# Altium PCB Digital_voltmeter.PcbDoc
Units mm, origin at the board's own origin, x right, y up, seen from the top; angles counter-clockwise.
Board outline 77.6 x 47.12 mm, 2 copper layers (Top Layer, Bottom Layer); 35 components, 51 nets, 141 pads, 8 vias.
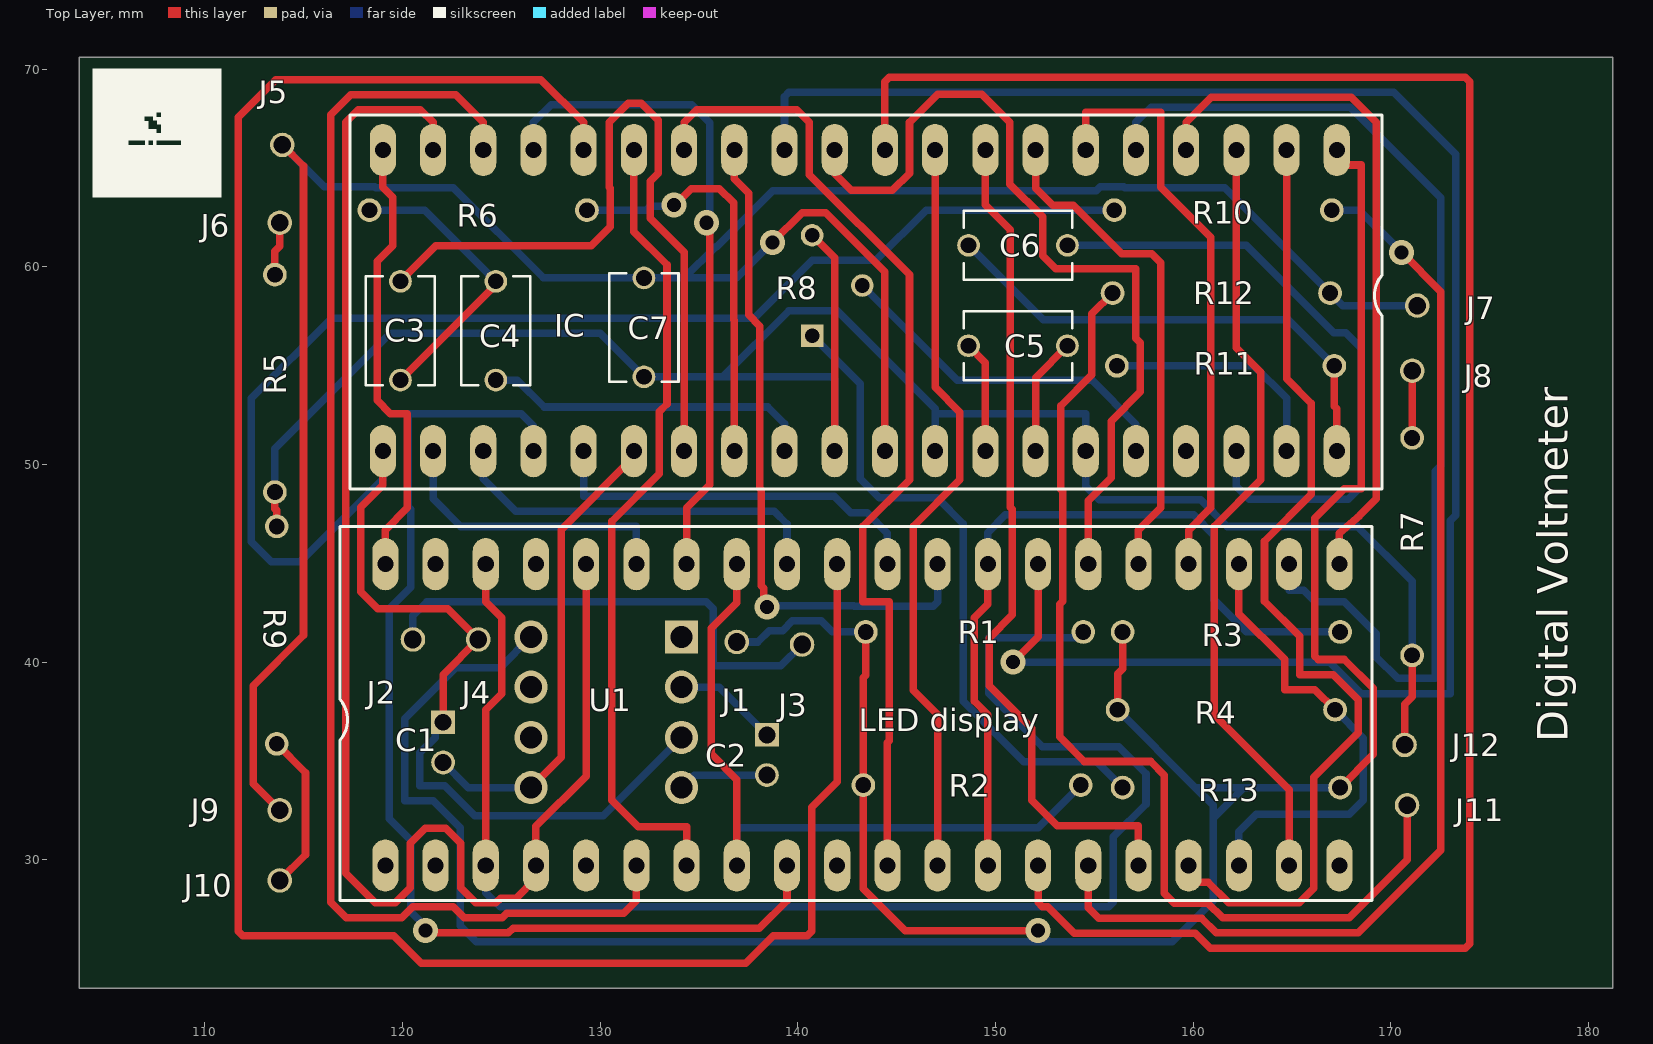
[diagram p0: Top Layer view]
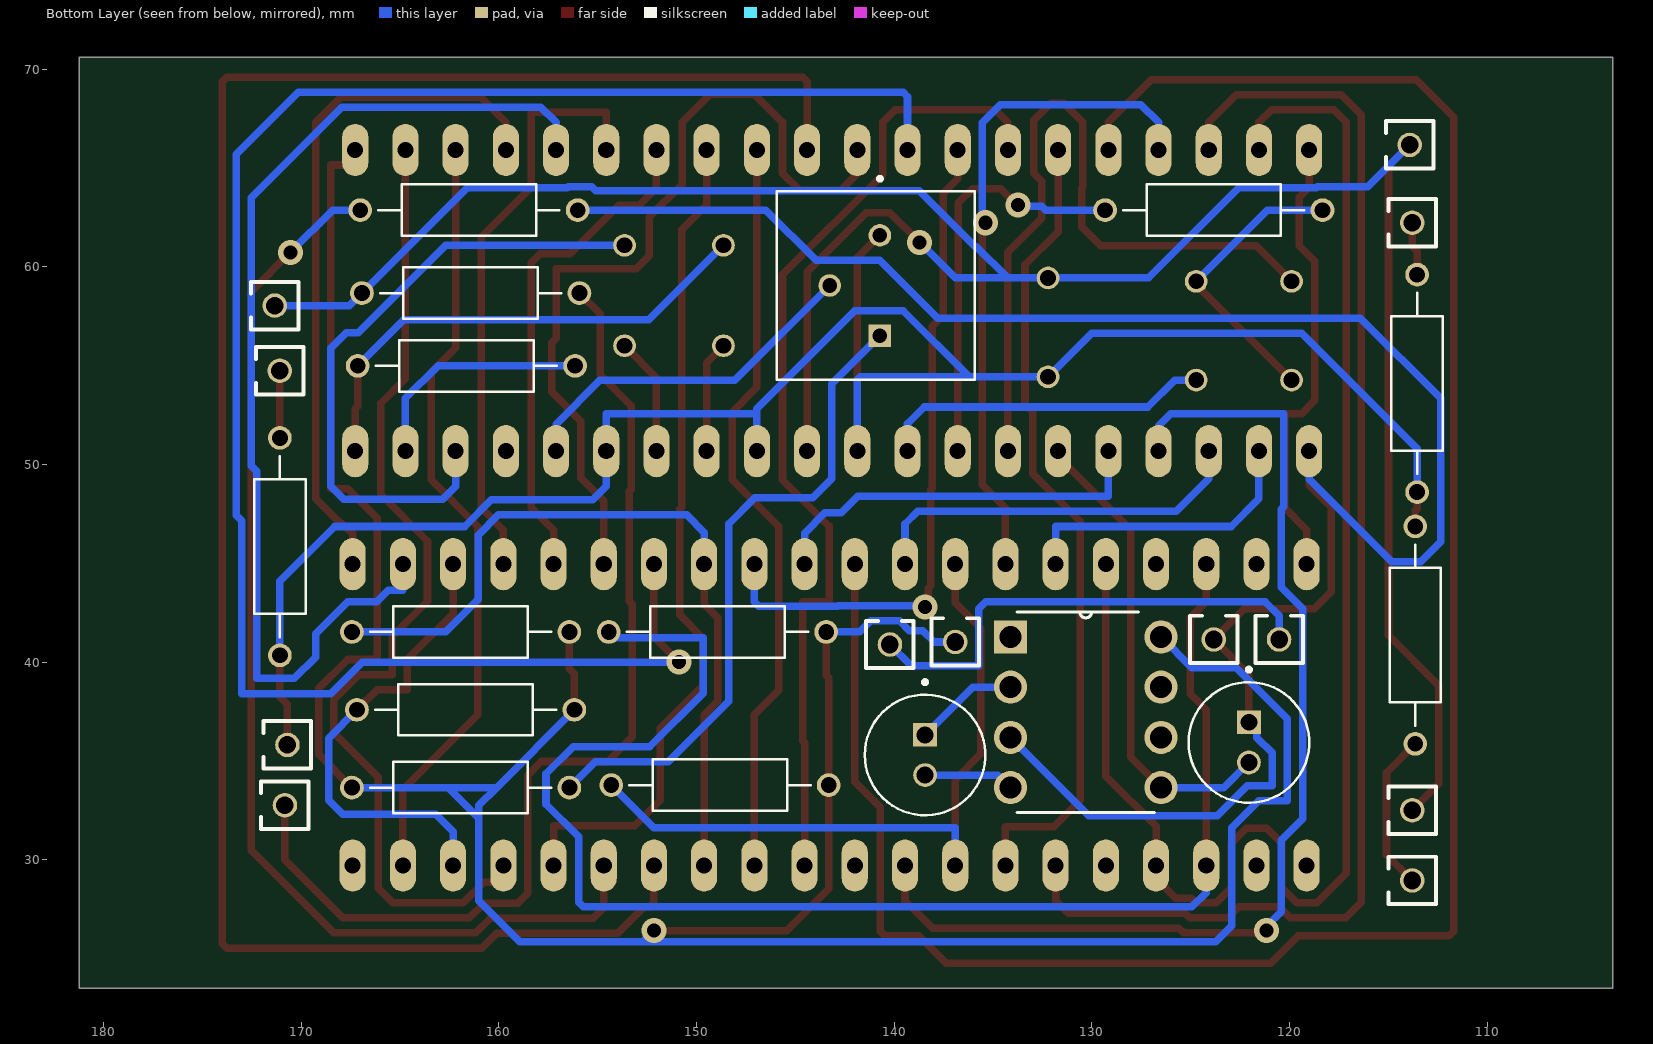
[diagram p1: Bottom Layer view, seen from below]
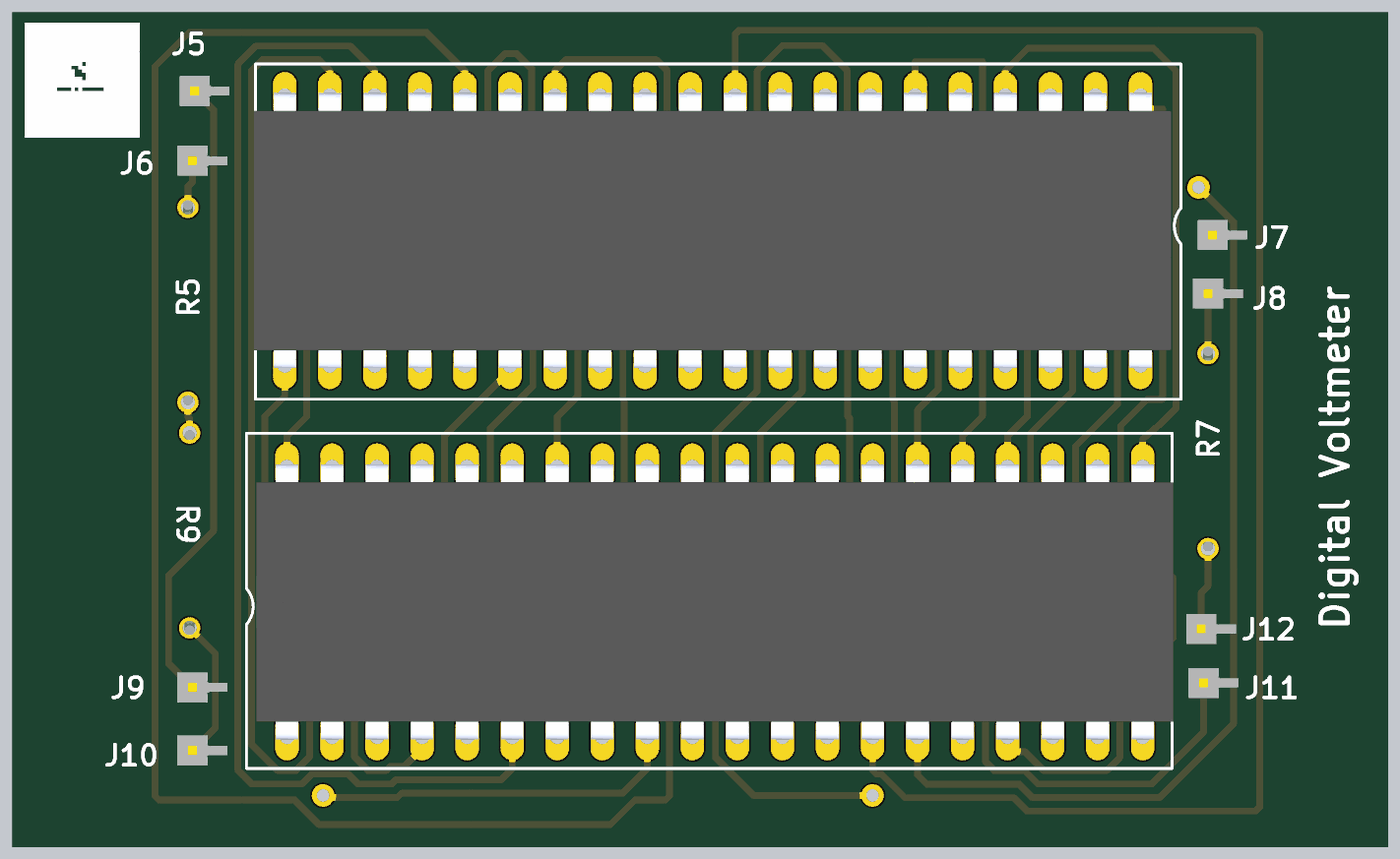
[diagram p2: 3D render of the assembled board from above, using the file's embedded part models]

## Layer stack, top to bottom
Top Solder: solder mask 0.0102, Solder Resist, Dk 3.5
Top Layer: signal copper 0.0356
Dielectric 1: dielectric 0.32, FR-4, Dk 4.8
Bottom Layer: signal copper 0.0356
Bottom Solder: solder mask 0.0102, Solder Resist, Dk 3.5

## Board outline
103.632,23.495 181.229,23.495 181.229,70.612 103.632,70.612

## Design rules (kind name [scope] priority, off if disabled: settings)
Clearance [All] p1: gap=0.5 ignorepadtopadclearanceinfootprint=TRUE except(0.381: Arc-Arc Arc-Track Arc-SMDPad Arc-THPad Arc-Via Arc-Fill Arc-Poly Arc-Region Arc-Text Track-Track Track-SMDPad Track-THPad Track-Via Track-Fill Track-Poly Track-Region Track-Text; 0.508: Arc-Hole Track-Hole SMDPad-Hole THPad-Hole Via-Hole Fill-Hole Poly-Hole Region-Hole Text-Hole)
HoleToHoleClearance [All] p1: gap=0.5 allowstackedmicrovias=TRUE
PolygonConnect [All] p1: connectstyle=Relief reliefconductorwidth=0.254 reliefentries=4 polygonreliefangle="90 Angle" airgapwidth=0.254
RoutingVias [All] p1: holewidth=0.711 width=1.27 viastyle="Through Hole" minholewidth=0.711 minwidth=1.27 maxholewidth=0.711 maxwidth=1.27
SolderMaskExpansion [All] p1: expansion=0.102 istentingtop=FALSE
Width [All] p1: maxlimit=0.508 minlimit=0.254 preferedwidth=0.381
29 further rules are at their usual default settings.

## Components (designator, comment, footprint, x,y, rotation, side; value= is the part's Value field where it differs from the comment)
C1 "100 uF" CAPPRD500W60D1250H2000 122.047,35.941 r90 top value=$0.77
C2 "100 uF" CAPPRD500W60D1250H2000 138.43,35.306 r90 top value=$0.77
C3 "0.22uF" CAPRB500W50L550T350H600 119.888,56.769 r90 top value=$0.51
C4 "0.47uF" CAPRB500W50L550T350H600 124.714,56.769 r90 top value=$0.51
C5 "100nF" CAPRB500W50L550T350H600 151.13,56.007 r180 top value=$0.51
C6 "100pF" CAPRB500W50L550T350H600 151.13,61.087 r180 top value=$0.51
C7 "20nF" CAPRB500W50L550T350H600 132.207,56.936 r270 top value=$0.51
IC "ICL7107CPLZ" DIL40 143.129,58.293 r180 top value=$11.2
J1 "SWT" SAMTEC_MTMM-101-XX-X-S-XXX 136.906,41.021 r0 top
J2 "VCC" SAMTEC_MTMM-101-XX-X-S-XXX 120.523,41.148 r0 top
J3 "SWT" SAMTEC_MTMM-101-XX-X-S-XXX 140.208,40.894 r0 top
J4 "GND" SAMTEC_MTMM-101-XX-X-S-XXX 123.825,41.148 r0 top
J5 "GND" SAMTEC_MTMM-101-XX-X-S-XXX 113.919,66.167 r270 top
J6 "GND" SAMTEC_MTMM-101-XX-X-S-XXX 113.792,62.23 r270 top
J7 "GND" SAMTEC_MTMM-101-XX-X-S-XXX 171.323,58.039 r270 top
J8 "GND" SAMTEC_MTMM-101-XX-X-S-XXX 171.069,54.737 r270 top
J9 "GND" SAMTEC_MTMM-101-XX-X-S-XXX 113.792,32.512 r270 top
J10 "GND" SAMTEC_MTMM-101-XX-X-S-XXX 113.792,28.956 r270 top
J11 "IN+" SAMTEC_MTMM-101-XX-X-S-XXX 170.815,32.766 r270 top
J12 "IN-" SAMTEC_MTMM-101-XX-X-S-XXX 170.688,35.814 r270 top
"LED display" "" DIL40 143.256,37.338 r0 top
R1 "330E" RESAD1100W55L680D260 148.932,41.529 r180 top value=$0.05
R2 "330E" RESAD1100W55L680D260 148.805,33.782 r180 top value=$0.05
R3 "330E" RESAD1100W55L680D260 161.925,41.529 r180 top value=$0.05
R4 "330E" RESAD1100W55L680D260 161.671,37.592 r180 top value=$0.05
R5 "1K" RESAD1100W55L680D260 113.538,54.102 r270 top value=$0.05
R6 "47K" RESAD1100W55L680D260 123.825,62.865 r180 top value=$0.05
R7 "10K" RESAD1100W55L680D260 171.069,45.847 r270 top value=$0.05
R8 "10K" TRIM_3296P-1-502LF 140.716,59.055 r270 top value=$1.92
R9 "100K" RESAD1100W55L680D260 113.633,41.37 r90 top value=$0.05
R10 "330E" RESAD1100W55L680D260 161.505,62.865 r0 top value=$0.05
R11 "100K" RESAD1100W55L680D260 161.632,54.991 r0 top value=$0.05
R12 "1M" RESAD1100W55L680D260 161.417,58.674 r0 top value=$0.05
R13 "22K" RESAD1100W55L680D260 161.925,33.655 r0 top value=$0.05
U1 "ICL7660SCPAZ" DIP254P762X533-8 134.112,33.655 r0 top value=$2.12

## Footprints (in the part's own frame and the unit in brackets; to place one, negate y for a bottom-side part, rotate by r counter-clockwise, add the part's x,y. Pads: shape width x height; smd on the part's side, far side on the other; paste and mask are expansions set on the pad)
CAPPRD500W60D1250H2000 [mm]
  round 1.2 hole 0.85: N(-1.016,0)
  rect 1.2x1.2 hole 0.85: P(1.016,0)
  body extent -2.52,-2.34 2.52,2.67, height 0.79
CAPRB500W50L550T350H600 [mm]
  round 1.15 hole 0.8: 1(-2.5,0) 2(2.5,0)
  silkscreen extent -2.75,-1.75 2.75,1.75, body extent -2.88,-1.91 2.62,1.59, height 0.19
DIL40 [mil]
  oval 52x104 hole 32: 1(-950,-300) 2(-850,-300) 3(-750,-300) 4(-650,-300) 5(-550,-300) 6(-450,-300) 7(-350,-300) 8(-250,-300) 9(-150,-300) 10(-50,-300) 11(50,-300) 12(150,-300) 13(250,-300) 14(350,-300) 15(450,-300) 16(550,-300) 17(650,-300) 18(750,-300) 19(850,-300) 20(950,-300) 21(950,300) 22(850,300) 23(750,300) 24(650,300) 25(550,300) 26(450,300) 27(350,300) 28(250,300) 29(150,300) 30(50,300) 31(-50,300) 32(-150,300) 33(-250,300) 34(-350,300) 35(-450,300) 36(-550,300) 37(-650,300) 38(-750,300) 39(-850,300) 40(-950,300)
  silkscreen extent -1040,-370 1015,375, body extent -1019,-306 1019,306, height 351
DIP254P762X533-8 [mil]
  rect 66x66 / inner round 66 / far side rect 66x66 hole 44: 1(0,300)
  round 66 hole 44: 2(0,200) 3(0,100) 4(0,0) 5(-300,0) 6(-300,100) 7(-300,200) 8(-300,300)
  body extent -306,-44 5,334, height 100
RESAD1100W55L680D260 [mm]
  round 1.2 hole 0.8: 1(-5.5,0) 2(5.5,0)
  body extent -5.9,-1.3 5.65,1.3, height 0.26
SAMTEC_MTMM-101-XX-X-S-XXX [mm]
  round 1.24 hole 0.89: 01(0,0)
  body extent -1,-1 1,1, height 1.85
TRIM_3296P-1-502LF [mm]
  rect 1.14x1.14 hole 0.74: 1(2.54,0)
  round 1.14 hole 0.74: 2(0,2.54) 3(-2.54,0)
  body extent -4.7,-5.25 4.83,6.3, height 1.72

## Part data
C1 C2: library part ECA2WM100B, "CAP ALUM 10UF 20% 450V RADIAL", Package="RADIAL-2 Panasonic", Availability="In Stock", Check_prices=https://www.snapeda.com/parts/ECA-2WM100B/Panasonic/view-part/2313535/?ref=eda, MF=Panasonic, MP=ECA-2WM100B, Price=None, Purchase-URL=https://pricing.snapeda.com/search/part/ECA-2WM100B/?ref=eda, SnapEDA_Link=https://www.snapeda.com/parts/ECA-2WM100B/Panasonic/view-part/2313535/?ref=snap, Supplier 1=Mouser, Supplier 2=Mouser
C3 C4 C5 C6 C7: library part FG26X7R2E104KNT06, "0.1ÂµF Â±10% 250V Ceramic Capacitor X7R Radial", Package="Radial TDK", Availability="In Stock", Check_prices=https://www.snapeda.com/parts/FG26X7R2E104KNT06/TDK/view-part/?ref=eda, MF=TDK, MP=FG26X7R2E104KNT06, Price=None, Purchase-URL=https://pricing.snapeda.com/search/part/FG26X7R2E104KNT06/?ref=eda, SnapEDA_Link=https://www.snapeda.com/parts/FG26X7R2E104KNT06/TDK/view-part/?ref=snap, Supplier 1=Mouser
IC: "Display Driver 3.5 Digit 40-DIP", Package="DIP-40 Intersil", ComponentLink1Description="New link", Digi-Key_Part_Number=ICL7107CPLZ-ND, Digi-Key_Purchase_URL=https://www.digikey.in/product-detail/en/renesas-electronics-america-inc/ICL7107CPLZ/ICL7107CPLZ-ND/821475?utm_source=snapeda&utm_medium=aggregator&utm_campaign=symbol, MF="Renesas Electronics", MP=ICL7107CPLZ, SnapEDA_Link=https://www.snapeda.com/parts/ICL7107CPLZ/Renesas%20Electronics%20America%20Inc./view-part/45306/?ref=snap, Supplier 1=Mouser
J1 J2 J3 J4 J5 J6 J7 J8 J9 J10 J11 J12: library part MTMM-101-XX-X-S-XXX, "Connector Header position", Package=None, Availability=Unavailable, MP=MTMM-101-XX-X-S-XXX, Price=None
"LED display": library part "7 segmented display", "DISPLAY 7SEG 0.56\" SGL GRN 10DIP x4", part name=LDSC512RI, Supplier Part Number 1=696-LDS-C512RI, check price=https://www.snapeda.com/parts/LDSC512RI/Lumex%20Optoelectronics/view-part/?ref=search&t=LDSC512RI, ComponentLink1Description=link, ComponentLink1URL=https://www.snapeda.com/parts/LDSC512RI/Lumex%20Optoelectronics/view-part/?ref=search&t=LDSC512RI, MP="Lumex Optoelectronics", Supplier 1=Mouser
R1 R2 R3 R4 R5 R6 R7 R9 R10 R11 R12 R13: library part MFR-25FBF52-1K, "1.78 kOhms Â±1% 0.25W, 1/4W Through Hole Resistor Axial - Metal Film", Package="Axial Yageo", Availability="In Stock", Check_prices=https://www.snapeda.com/parts/MFR-25FBF52-1K/Yageo/view-part/?ref=eda, MF=Yageo, MP=MFR-25FBF52-1K, Price=None, Purchase-URL=https://pricing.snapeda.com/search/part/MFR-25FBF52-1K/?ref=eda, SnapEDA_Link=https://www.snapeda.com/parts/MFR-25FBF52-1K/Yageo/view-part/?ref=snap, Supplier 1=Mouser
R8: library part 3296P-1-502LF, "Trimmer Cermet 5 kOhm linear 500 mW", Package="NON-STANDARD-3 Bourns", Availability="In Stock", Check_prices=https://www.snapeda.com/parts/3296P-1-502LF/Bourns/view-part/?ref=eda, MF=Bourns, MP=3296P-1-502LF, Price=None, Purchase-URL=https://pricing.snapeda.com/search/part/3296P-1-502LF/?ref=eda, SnapEDA_Link=https://www.snapeda.com/parts/3296P-1-502LF/Bourns/view-part/?ref=snap, Supplier 1=Rs
U1: "Charge Pump Switching Regulator IC Positive or Negative Fixed -Vin, 2Vin 1 Output 45mA 8-DIP (0.300, 7.62mm)", Package="DIP-8 Renesas / Intersil", Supplier Part Number 1=9215585P, Availability="In Stock", Check_prices=https://www.snapeda.com/parts/ICL7660SCPAZ/Renesas/view-part/?ref=eda, MF="Renesas Electronics America Inc", MP=ICL7660SCPAZ, Price=None, Purchase-URL=https://pricing.snapeda.com/search/part/ICL7660SCPAZ/?ref=eda, SnapEDA_Link=https://www.snapeda.com/parts/ICL7660SCPAZ/Renesas/view-part/?ref=snap, Supplier 1=Rs

## Via types
v1: diameter 1.27, hole 0.711, Top Layer to Bottom Layer, 8 vias

## Nets (pads, with @x,y where several pads share a name; then routed paths per layer and width w, separated by ;. In a path a pad name is that pad's centre, name@x,y a point inside that pad or via, vN(x,y) a via of type N, cw(c..) or ccw(c..) an arc to the next point about the centre after c; other vN are vias at no path point)
+VCC: IC.1 J1.01 R1.2 R2.2 R3.2 R4.2 R13.2 U1.8 | length 153.5
  Top Layer w0.381: R1.2 143.432,39.349 143.305,39.222 R2.2 143.294,33.771 143.294,28.547 145.425,26.416 v1(152.146,26.416) ; R4.2 156.171,39.421 156.425,39.675 R3.2 ; IC.1 167.259,65.151 168.504,65.151 168.504,48.768 167.64,48.768 166.141,47.269 166.141,40.31 166.316,40.135 167.64,40.135 169.105,38.67 169.105,35.334 R13.2
  Bottom Layer w0.381: U1.8 124.943,39.726 122.692,39.726 120.114,37.147 120.114,32.992 121.545,32.992 122.911,31.626 122.911,26.67 123.723,25.857 152.705,25.857 ; J1.01 137.973,41.021 138.544,41.593 139.221,41.593 139.714,42.086 141.184,42.086 141.741,41.529 R1.2 ; v1(152.146,26.416) 152.705,25.857 ; R4.2 160.108,33.655 ; R13.2 162.56,33.655 ; 152.705,25.857 158.928,25.857 161.011,27.94 161.011,32.106 ; 160.108,33.655 162.56,33.655 ; 160.108,33.655 161.011,32.752 161.011,32.106 ; 161.011,32.106 162.56,33.655
GND: C1.P IC.21 J4.01 R10.1 U1.3 | length 103.9
  Top Layer w0.381: IC.21 118.999,48.946 117.881,47.828 117.881,43.561 118.745,42.697 122.276,42.697 J4.01 122.047,39.37 C1.P
  Bottom Layer w0.381: IC.21 118.999,49.262 114.822,45.085 113.349,45.085 112.344,46.09 112.344,53.34 116.408,57.404 137.795,57.404 140.716,60.325 143.942,60.325 146.482,62.865 R10.1 ; C1.P 121.641,36.957 121.641,36.175 120.876,35.41 120.876,33.754 122.126,33.754 123.647,32.233 130.15,32.233 U1.3
NetC1_N: C1.N IC.26 U1.5 | length 24.1
  Top Layer w0.381: U1.5 128.016,35.179 128.016,46.711 131.699,50.394 IC.26
  Bottom Layer w0.381: C1.N 123.317,33.655 U1.5
NetC2_N: C2.N U1.4 | length 4.6
  Bottom Layer w0.381: U1.4 134.747,34.29 C2.N
NetC2_P: C2.P U1.2 | length 5.3
  Bottom Layer w0.381: U1.2 136.017,38.735 C2.P
NetC3_1: C3.1 C4.2 R6.2 | length 14.9
  Top Layer w0.381: C3.1 124.714,59.095 C4.2
  Bottom Layer w0.381: R6.2 121.118,62.865 C4.2
NetC3_2: C3.2 IC.27 | length 37.9
  Top Layer w0.381: C3.2 121.681,61.062 129.54,61.062 130.505,62.027 130.505,63.983 130.454,64.033 130.454,67.31 131.42,68.275 132.08,68.275 132.931,67.424 132.931,64.742 132.524,64.336 132.524,62.446 134.239,60.731 IC.27
NetC4_1: C4.1 IC.29 | length 16.9
  Bottom Layer w0.381: C4.1 125.804,54.269 127.165,52.908 138.481,52.908 139.319,52.07 IC.29
NetC5_1: C5.1 IC.34 | length 6
  Top Layer w0.381: IC.34 152.019,54.396 C5.1
NetC5_2: C5.2 IC.33 | length 5.7
  Top Layer w0.381: C5.2 149.479,55.158 IC.33
NetC6_1: C6.1 IC.38 | length 32.7
  Bottom Layer w0.381: C6.1 162.687,61.087 167.107,56.667 167.716,56.667 168.504,55.88 168.504,48.895 167.843,48.235 162.839,48.235 162.179,48.895 IC.38
NetC6_2: C6.2 IC.40 R11.2 | length 25.4
  Top Layer w0.381: R11.2 167.132,52.959 167.259,52.832 IC.40
  Bottom Layer w0.381: C6.2 152.4,57.317 164.806,57.317 R11.2
NetC7_1: C7.1 IC.31 J5.01 J7.01 J9.01 R12.2 | length 122.1
  Top Layer w0.381: J9.01 112.446,33.858 112.446,38.811 114.986,41.351 114.986,65.1 J5.01 ; v1(138.709,61.239) 140.208,62.738 141.416,62.738 144.399,59.755 IC.31
  Bottom Layer w0.381: J5.01 116.027,64.059 118.593,64.059 118.643,64.008 122.555,64.008 127.127,59.436 C7.1 134.255,59.436 ; v1(138.709,61.239) 136.906,59.436 134.255,59.436 ; J7.01 167.552,58.039 R12.2 161.583,64.008 156.54,64.008 156.489,64.059 155.296,64.059 155.092,63.856 138.714,63.856 135.882,61.023 135.843,61.023 134.255,59.436
NetC7_2: C7.2 IC.30 IC.32 IC.35 J12.01 R5.2 R7.2 R8.3 R9.2 | length 105.3
  Top Layer w0.381: R5.2 113.538,47.771 113.633,47.676 R9.2 ; R8.3 141.859,60.452 IC.30 ; J12.01 170.688,37.871 171.069,38.252 R7.2
  Bottom Layer w0.381: R5.2 113.538,50.8 119.38,56.642 130.001,56.642 C7.2 136.199,54.436 ; IC.30 141.859,54.28 141.703,54.436 136.199,54.436 ; IC.32 146.939,52.578 ; R7.2 171.069,44.094 168.3,46.863 161.722,46.863 160.376,48.209 155.245,48.209 154.559,48.895 IC.35 154.559,52.578 146.939,52.578 ; 136.199,54.436 139.548,57.785 141.986,57.785 146.939,52.832 146.939,52.578
NetIC_2: "LED display.17" IC.2 | length 50.4
  Top Layer w0.381: 159.766,29.718 159.766,29.312 160.2,28.878 160.744,28.878 161.796,27.826 165.356,27.826 166.091,28.56 166.091,34.169 168.343,36.421 168.343,38.1 167.07,39.373 165.379,39.373 165.379,41.3 163.601,43.078 163.601,46.126 165.964,48.489 165.964,53.086 164.719,54.331 IC.2
NetIC_3: "LED display.19" IC.3 | length 39.3
  Top Layer w0.381: IC.3 162.179,55.905 163.424,54.661 163.424,49.225 161.061,46.863 161.061,37.338 164.846,33.553 164.846,29.718
NetIC_4: "LED display.21" IC.4 | length 35.3
  Top Layer w0.381: IC.4 159.639,67.31 160.909,68.58 167.996,68.58 169.266,67.31 169.266,48.26 168.427,47.422 167.386,46.533 167.386,44.958
NetIC_5: "LED display.22" IC.5 | length 54.7
  Bottom Layer w0.381: IC.5 157.099,67.31 157.861,68.072 167.945,68.072 172.517,63.5 172.517,49.936 172.24,49.66 172.24,39.175 170.349,39.175 169.266,40.259 169.266,41.44 167.64,43.066 166.167,43.066 165.595,43.637 164.846,43.637 164.846,44.958
NetIC_6: "LED display.24" IC.6 | length 30.1
  Top Layer w0.381: IC.6 154.559,67.818 158.344,67.818 158.344,64.033 160.884,61.493 160.884,47.803 159.766,46.685 159.766,44.958
NetIC_7: "LED display.25" IC.7 | length 25.5
  Top Layer w0.381: IC.7 152.019,63.983 152.883,63.119 153.924,63.119 156.385,60.658 157.901,60.658 158.344,60.216 158.344,47.803 157.226,46.685 157.226,44.958
NetIC_8: "LED display.16" IC.8 | length 42.8
  Top Layer w0.381: IC.8 149.479,63.144 150.749,61.874 150.749,47.828 150.851,47.727 150.851,42.393 149.669,41.212 149.669,38.798 151.816,36.652 151.816,33.02 153.111,31.725 157.226,31.725 157.226,29.718
NetIC_9: "LED display.12" IC.9 | length 38.2
  Top Layer w0.381: IC.9 146.939,53.899 148.184,52.654 148.184,49.225 145.821,46.863 145.821,38.583 147.066,37.338 147.066,29.718
NetIC_10: "LED display.14" IC.10 | length 101.6
  Top Layer w0.381: IC.10 144.399,69.373 144.622,69.596 173.767,69.596 173.99,69.373 173.99,25.763 173.767,25.54 160.849,25.54 160.1,26.289 153.979,26.289 152.646,27.622 152.369,27.622 152.146,27.846 152.146,29.718
NetIC_11: "LED display.26" IC.11 | length 43.1
  Top Layer w0.381: IC.11 141.859,64.719 142.697,63.881 144.78,63.881 145.644,64.745 145.644,67.31 147.066,68.732 149.301,68.732 150.724,67.31 150.724,64.186 152.375,62.535 152.375,60.554 153.035,59.893 157.099,59.893 157.099,56.388 157.328,56.159 157.328,53.67 155.854,52.197 155.854,49.327 154.686,48.158 154.686,44.958
NetIC_12: "LED display.27" IC.12 | length 93.7
  Top Layer w0.381: v1(150.876,40.005) 152.146,41.275 152.146,44.958
  Bottom Layer w0.381: IC.12 139.319,68.611 139.542,68.834 170.129,68.834 173.279,65.684 173.279,47.422 173.002,47.145 173.002,38.413 168.485,38.413 166.893,40.005 v1(150.876,40.005)
NetIC_13: "LED display.29" IC.13 | length 34.5
  Top Layer w0.381: IC.13 136.779,64.453 137.503,63.729 137.503,57.569 138.074,56.998 138.074,48.793 138.138,48.73 138.138,43.864 138.26,43.742 138.26,42.969 v1(138.43,42.799)
  Bottom Layer w0.381: v1(138.43,42.799) 138.479,42.848 142.833,42.848 142.851,42.83 146.843,42.83 147.066,43.053 147.066,44.958
NetIC_14: "LED display.11" IC.14 | length 50.3
  Top Layer w0.381: IC.14 134.239,67.31 134.874,67.945 139.929,67.945 140.564,67.31 140.564,64.668 145.644,59.588 145.644,49.225 143.281,46.863 143.281,43.053 144.628,43.053 144.628,36.017 144.526,35.916 144.526,29.718
NetIC_15: "LED display.7" IC.15 | length 41
  Top Layer w0.381: IC.15 131.699,61.773 133.375,60.096 133.375,53.061 132.994,52.68 132.994,49.53 130.581,47.117 130.581,33.02 131.928,31.674 134.366,31.674 134.366,29.718
NetIC_16: "LED display.31" IC.16 | length 111.2
  Top Layer w0.381: IC.16 129.159,67.31 127,69.469 113.589,69.469 111.684,67.564 111.684,26.385 111.907,26.162 119.553,26.162 120.95,24.765 137.349,24.765 138.746,26.162 140.467,26.162 140.691,26.385 140.691,32.664 141.986,33.96 141.986,44.958
NetIC_17: "LED display.34" IC.17 | length 34
  Top Layer w0.381: 134.366,44.958 134.366,47.803 135.534,48.971 135.534,62.078 v1(135.382,62.23)
  Bottom Layer w0.381: IC.17 126.619,67.31 127.508,68.199 134.62,68.199 135.534,67.285 135.534,62.382 v1(135.382,62.23)
NetIC_18: "LED display.6" IC.18 | length 68.4
  Top Layer w0.381: IC.18 124.079,67.31 122.682,68.707 117.373,68.707 116.357,67.691 116.357,27.846 117.139,27.064 119.952,27.064 120.511,27.622 122.566,27.622 123.124,27.064 125.032,27.064 125.273,27.305 131.191,27.305 131.826,27.94 131.826,29.718
NetIC_19: "LED display.4" "LED display.36" IC.19 | length 77.8
  Top Layer w0.381: IC.19 121.539,67.31 120.904,67.945 117.754,67.945 117.119,67.31 117.119,29.322 118.616,27.826 119.636,27.826 120.396,28.585 120.396,30.851 121.156,31.61 122.176,31.61 122.936,30.851 122.936,28.585 123.696,27.826 124.716,27.826 124.958,28.067 125.755,28.067 126.746,29.058 126.746,29.718 126.746,31.699 129.286,34.239 129.286,44.958
NetIC_20: "LED display.40" IC.20 | length 23.1
  Top Layer w0.381: IC.20 118.999,64.033 119.507,63.525 119.507,61.062 118.72,60.274 118.72,53.238 119.38,52.578 120.244,52.578 120.244,47.803 119.126,46.685 119.126,44.958
NetIC_22: "LED display.35" IC.22 | length 15.2
  Bottom Layer w0.381: IC.22 121.539,48.26 122.936,46.863 131.826,46.863 131.826,44.958
NetIC_23: "LED display.32" IC.23 | length 19.7
  Bottom Layer w0.381: IC.23 124.079,49.276 125.73,47.625 138.811,47.625 139.446,46.99 139.446,44.958
NetIC_24: "LED display.9" IC.24 | length 56.1
  Top Layer w0.381: v1(121.158,26.416) 121.272,26.302 125.348,26.302 125.589,26.543 138.049,26.543 139.446,27.94 139.446,29.718
  Bottom Layer w0.381: v1(121.158,26.416) 121.158,26.649 120.421,27.386 120.421,30.984 119.329,32.076 119.329,42.697 120.421,43.79 120.421,47.727 120.294,47.854 120.294,52.578 126.009,52.578 126.619,51.968 IC.24
NetIC_25: "LED display.30" IC.25 | length 20
  Bottom Layer w0.381: IC.25 129.159,48.387 141.834,48.387 142.672,47.549 143.51,47.549 144.526,46.533 144.526,44.958
NetIC_28: IC.28 R6.1 | length 20.7
  Top Layer w0.381: v1(133.731,63.119) 133.761,63.119 134.599,63.957 136.017,63.957 136.741,63.233 136.741,57.328 136.779,57.29 IC.28
  Bottom Layer w0.381: R6.1 132.334,62.865 132.524,63.055 133.667,63.055 v1(133.731,63.119)
NetIC_36: IC.36 R8.2 | length 18.1
  Bottom Layer w0.381: R8.2 148.057,54.254 154.889,54.254 157.099,52.045 IC.36
NetIC_39: IC.39 R11.1 | length 11.9
  Bottom Layer w0.381: R11.1 163.068,54.991 164.719,53.34 IC.39
NetJ2_01: J2.01 J3.01 | length 24.6
  Bottom Layer w0.381: J2.01 120.523,42.342 121.234,43.053 135.357,43.053 135.712,42.697 135.712,39.827 139.141,39.827 J3.01
NetJ6_01: J6.01 R5.1 | length 2.7
  Top Layer w0.381: R5.1 113.538,60.782 113.792,61.036 J6.01
NetJ8_01: J8.01 R7.1 | length 3.4
  Top Layer w0.381: R7.1 J8.01
NetJ10_01: J10.01 R9.1 | length 8.1
  Top Layer w0.381: R9.1 115.087,34.416 115.087,30.251 J10.01
NetJ11_01: J11.01 R12.1 | length 52.5
  Top Layer w0.381: R12.1 154.864,57.621 154.864,54.534 153.289,52.959 153.289,48.743 153.391,48.641 153.391,43.078 153.238,42.926 153.238,36.22 154.483,34.976 157.836,34.976 158.521,34.29 158.521,28.321 159.029,27.813 160.731,27.813 161.48,27.064 167.881,27.064 170.815,29.997 J11.01
"NetLED display_3": "LED display.3" "LED display.38" R1.1 | length 73.9
  Top Layer w0.381: 124.206,29.718 124.206,37.592 125.019,38.405 125.019,42.24 124.206,43.053 124.206,44.958
  Bottom Layer w0.381: 124.206,29.718 124.206,28.346 124.93,27.622 155.733,27.622 155.956,27.846 155.956,31.166 157.607,32.817 157.607,34.347 156.238,35.715 152.372,35.715 149.657,38.43 149.657,41.224 154.127,41.224 R1.1
"NetLED display_8": "LED display.8" "LED display.33" R2.1 | length 36.5
  Top Layer w0.381: 136.906,29.718 136.906,34.061 135.611,35.357 135.611,41.707 136.906,43.002 136.906,44.958
  Bottom Layer w0.381: 136.906,29.718 136.906,31.623 152.146,31.623 R2.1
"NetLED display_13": "LED display.13" "LED display.28" R3.1 | length 40
  Top Layer w0.381: 149.606,29.718 149.606,37.338 148.907,38.036 148.907,42.24 149.606,42.939 149.606,44.958
  Bottom Layer w0.381: 149.606,44.958 149.606,46.558 150.495,47.447 160.02,47.447 161.036,46.431 161.036,43.18 162.687,41.529 R3.1
"NetLED display_15": "LED display.15" R10.2 | length 57.7
  Top Layer w0.381: 154.686,29.718 154.686,27.584 155.219,27.051 160.415,27.051 161.164,26.302 168.338,26.302 172.517,30.48 172.517,58.75 v1(170.536,60.731)
  Bottom Layer w0.381: R10.2 168.402,62.865 v1(170.536,60.731)
"NetLED display_18": "LED display.18" "LED display.23" R4.1 | length 24.1
  Top Layer w0.381: 162.306,44.958 162.306,42.457 164.617,40.146 164.617,38.611 166.152,38.611 R4.1
  Bottom Layer w0.381: 162.306,29.718 162.306,31.42 163.195,32.309 167.894,32.309 168.605,33.02 168.605,36.158 R4.1
NetR8_1: R8.1 R13.1 | length 33.2
  Bottom Layer w0.381: R8.1 143.154,54.077 143.154,49.276 144.12,48.311 147.041,48.311 148.361,46.99 148.361,38.024 151.432,34.953 155.126,34.953 R13.1
pads on no net: "LED display.1" "LED display.2" "LED display.5" "LED display.10" "LED display.20" "LED display.37" "LED display.39" IC.37 U1.1 U1.6 U1.7

## Silkscreen, mask and mechanical layers (free items; w line width, h text height)
Top Overlay:
  region: 110.82,68.605 110.82,68.402 110.82,63.525 104.318,63.525 104.318,70.028 110.82,70.028 hole: 107.366,67.589 106.959,67.589 106.959,67.386 107.163,67.386 107.163,67.183 107.163,66.98 107.569,66.98 107.569,66.777 107.772,66.777 107.772,67.183 107.569,67.183 107.569,67.386 107.366,67.386 hole: 108.788,66.37 107.569,66.37 107.569,66.167 108.788,66.167 hole: 107.366,66.37 107.163,66.37 107.163,66.167 107.366,66.167 hole: 106.959,66.37 106.147,66.37 106.147,66.167 106.959,66.167 hole: 107.772,67.793 107.569,67.793 107.569,67.589 107.772,67.589
  text "Digital Voltmeter" at 178.943,35.945 h1.52 r90
Top Component Outline:
  lines w0.125: 103.759,23.622 181.229,23.622 181.229,70.485 103.759,70.485 103.759,23.622
Bottom Component Outline:
  lines w0.125: 103.759,23.622 181.229,23.622 181.229,70.485 103.759,70.485 103.759,23.622